# Altium PCB Gas_leakage.PcbDoc
Units mm, origin at the board's own origin, x right, y up, seen from the top; angles counter-clockwise.
Board outline 62 x 72 mm, 2 copper layers (Top Layer, Bottom Layer), stack 1.1 mm thick; 23 components, 23 nets, 81 pads, 25 vias.
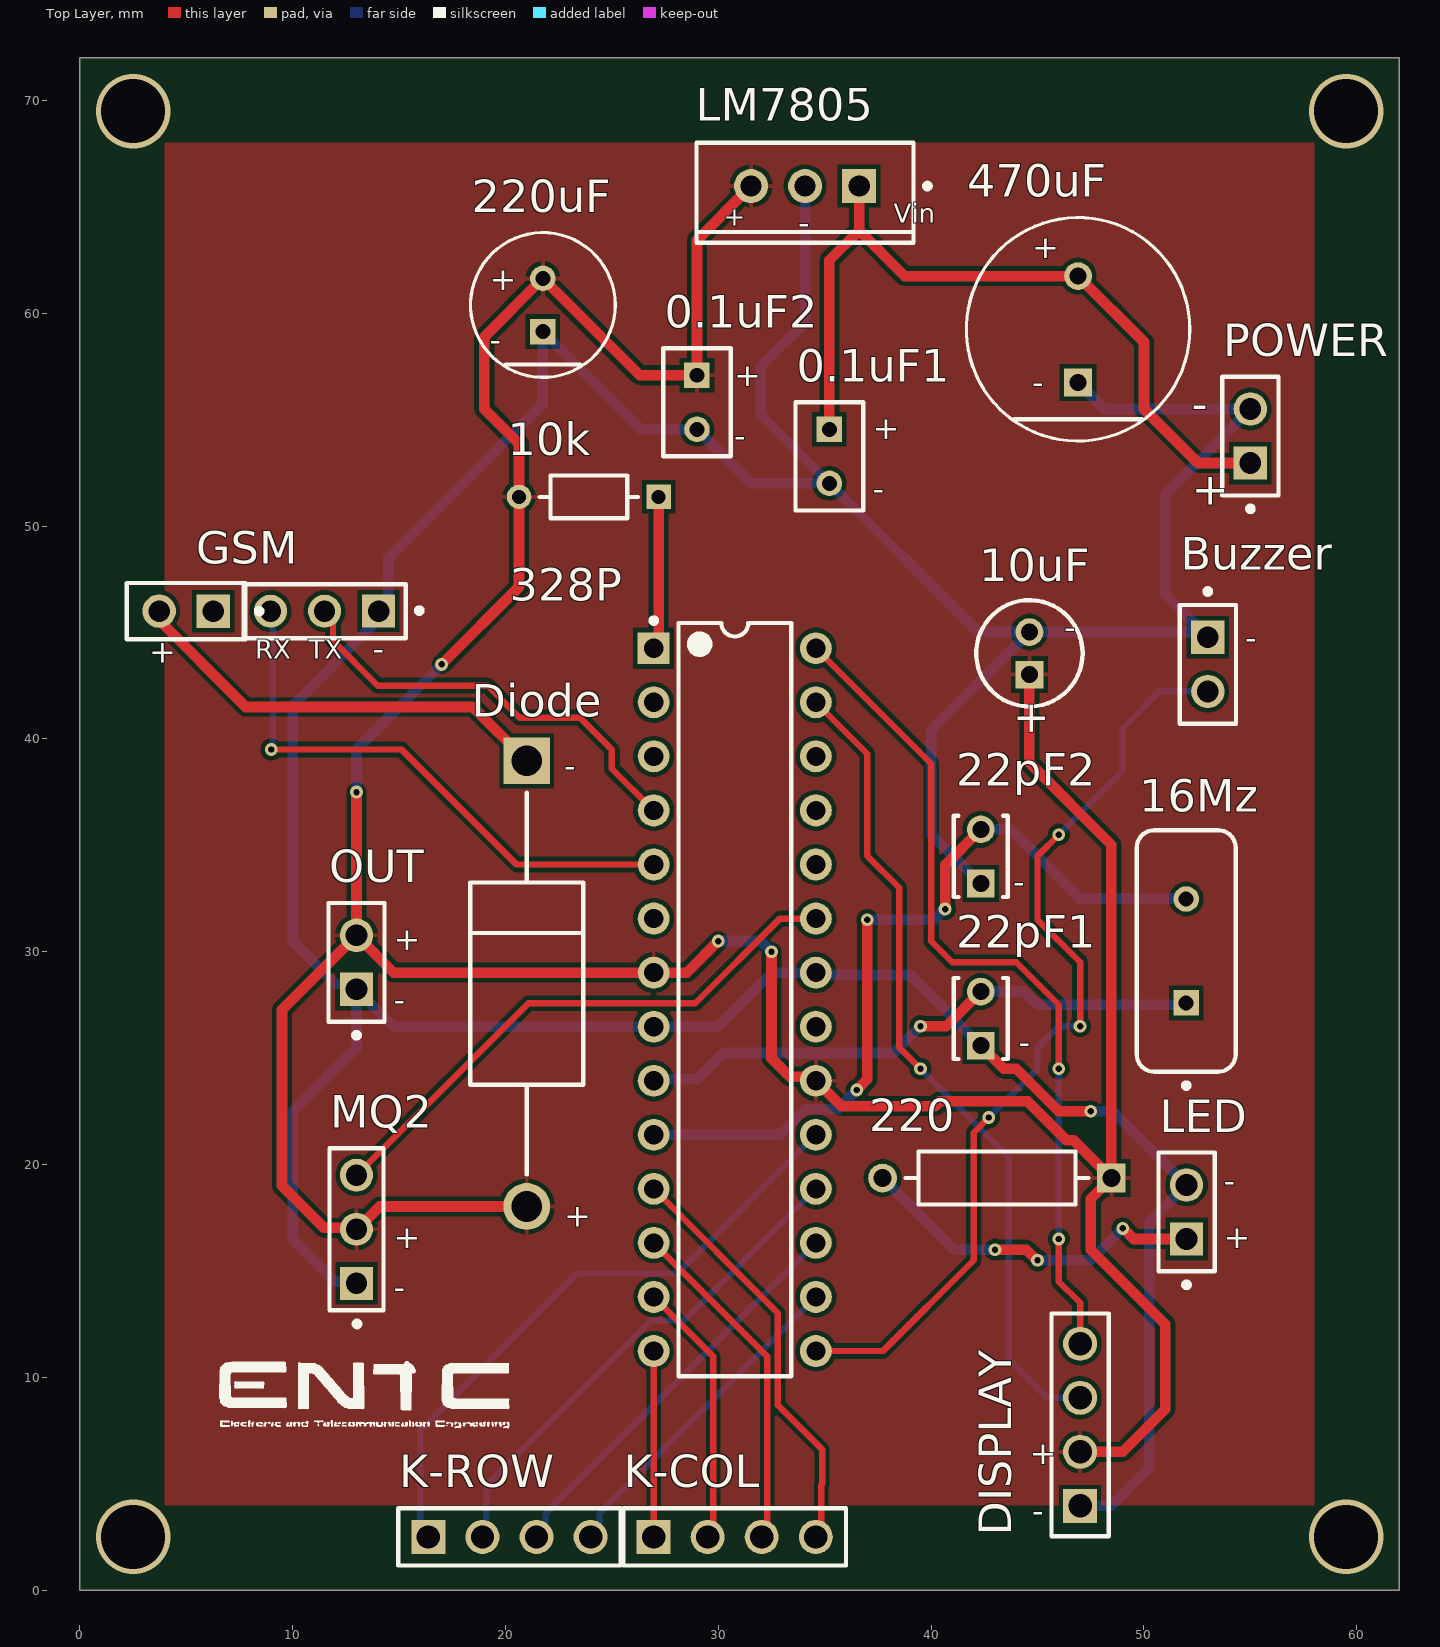
[diagram p0: Top Layer view]
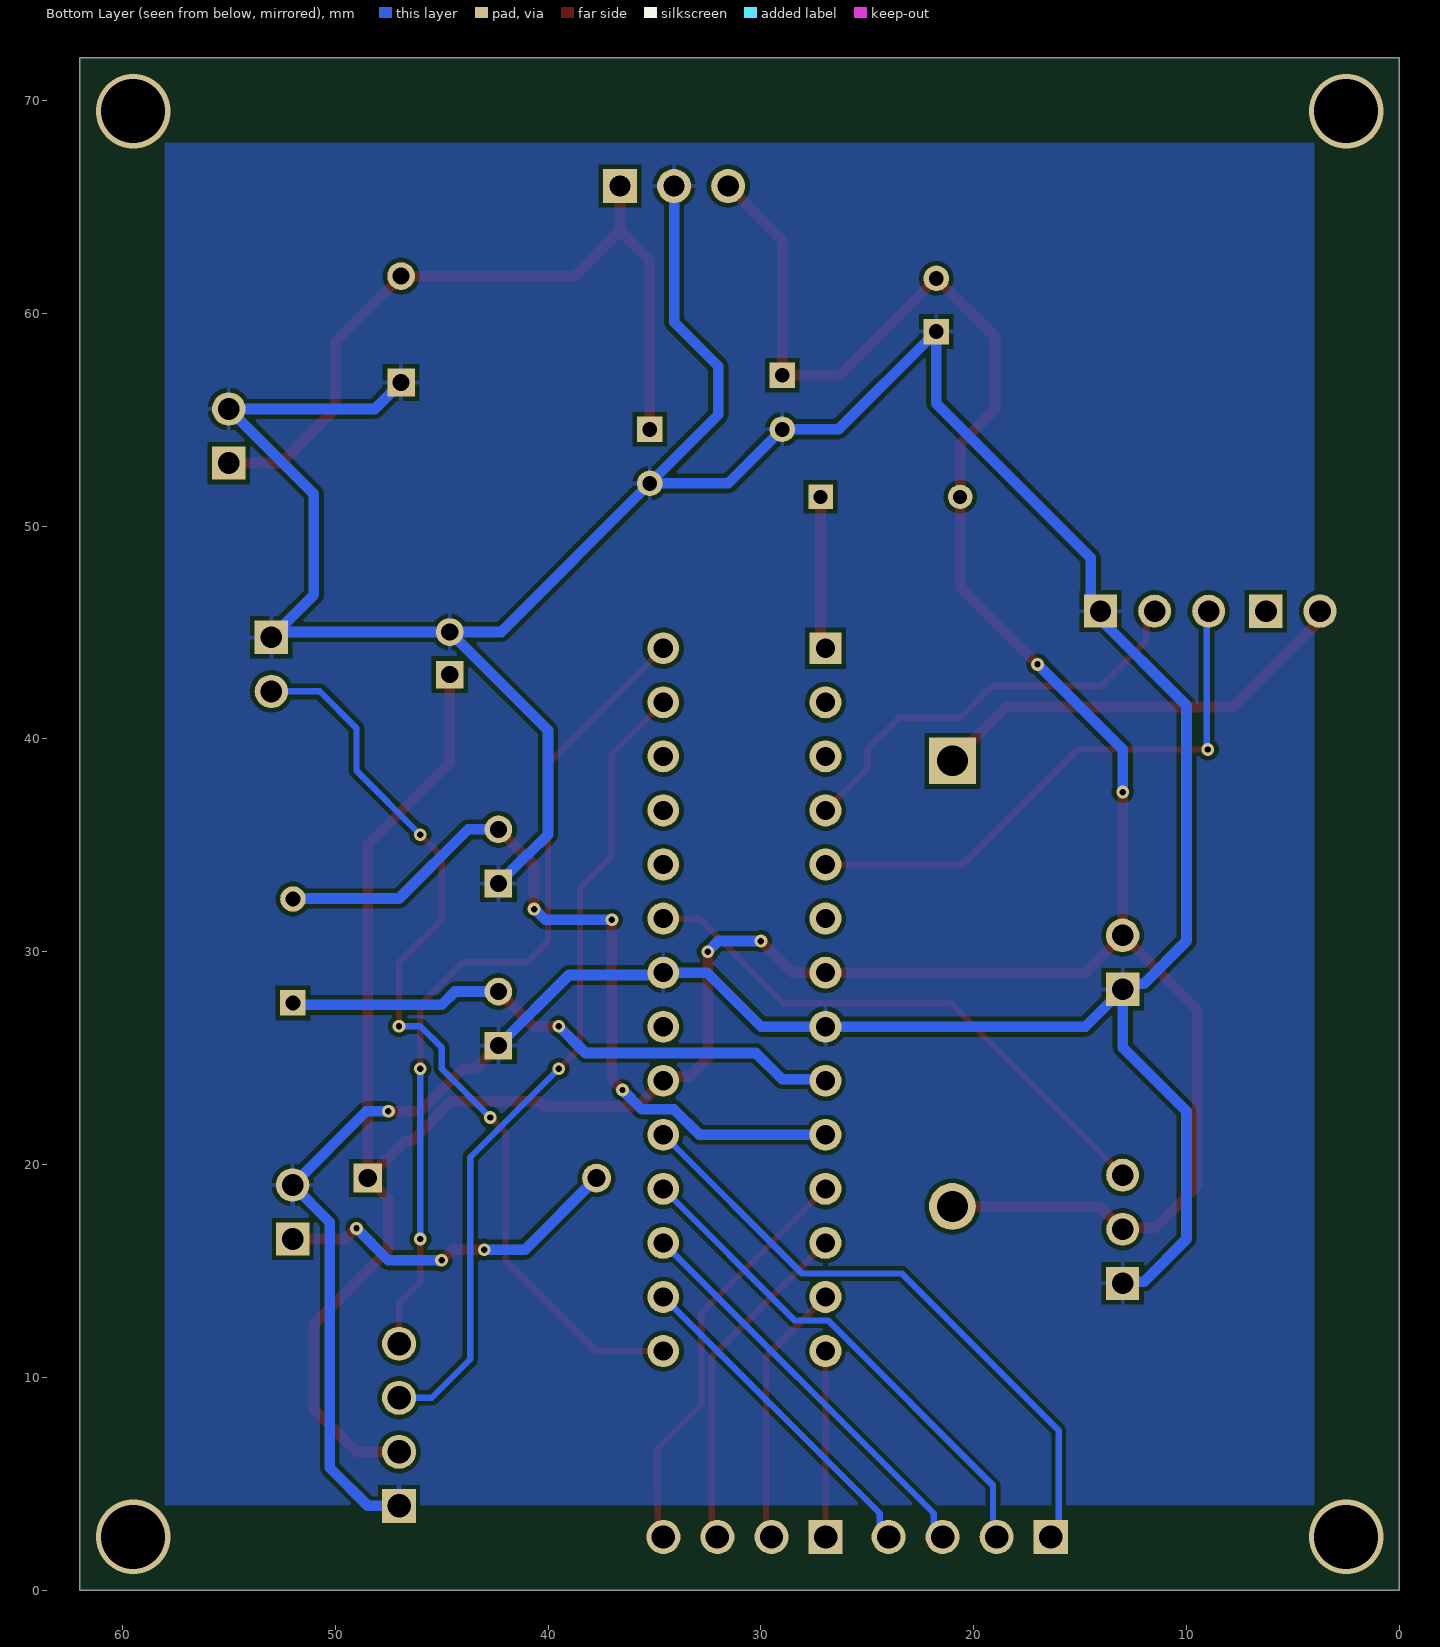
[diagram p1: Bottom Layer view, seen from below]
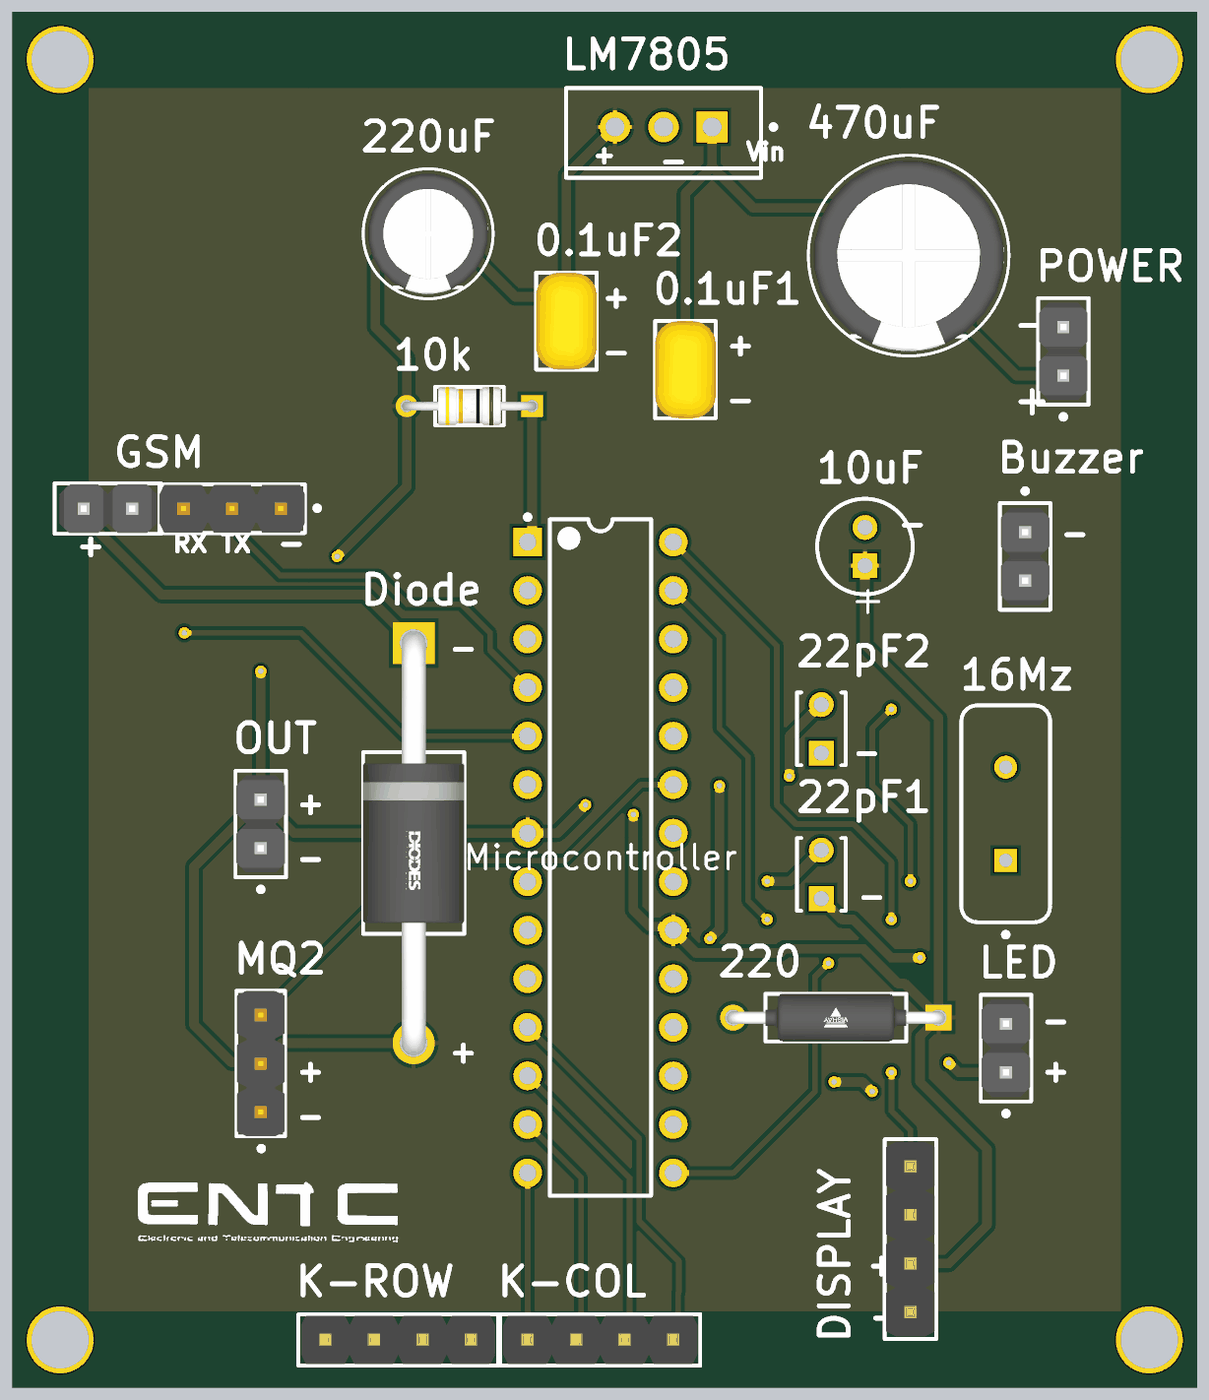
[diagram p2: 3D render of the assembled board from above, using the file's embedded part models]

## Layer stack, top to bottom
Top Solder: solder mask 0.05, SM-001, Dk 4
Top Layer: signal copper 0.1
Dielectric 1: dielectric 0.9, FR-4, Dk 4.8
Bottom Layer: signal copper 0.1
Bottom Solder: solder mask 0.05, SM-001, Dk 4

## Board outline
0,0 62,0 62,72 0,72

## Design rules (kind name [scope] priority, off if disabled: settings)
BoardOutlineClearance [All] p1: gap=0.2 ignorepadtopadclearanceinfootprint=FALSE
Clearance [All] p1: gap=0.203 ignorepadtopadclearanceinfootprint=FALSE except(0.25: Arc-Hole Track-Hole SMDPad-Hole THPad-Hole Via-Hole Fill-Hole Poly-Hole Region-Hole Text-Hole)
ComponentClearance [All] p1: gap=0.127 collisioncheckmode=3 verticalgap=0.127 showdistances=TRUE
DiffPairsRouting [All] p1: maxlimit=0.381 minlimit=0.203 mostfreqgap=0.203 toplayer_minwidth=0.203 toplayer_maxwidth=25.4 toplayer_prefwidth=0.203 bottomlayer_minwidth=0.203 bottomlayer_maxwidth=25.4 bottomlayer_prefwidth=0.203 maxuncoupledlength=12.7
Height [All] p1: minheight=0 maxheight=1816.048 prefheight=12.7
HoleSize [All] p1: absolutevalues=TRUE maxlimit=6.3 minlimit=0.3 maxpercent=80.000 minpercent=20.000
HoleToHoleClearance [All] p1: gap=0.25 allowstackedmicrovias=FALSE
MinimumAnnularRing [All] p1: minimumring=0.076
MinimumSolderMaskSliver [All] p1: minsoldermaskwidth=0
PlaneClearance [All] p1: clearance=0.203
PlaneConnect PlaneConnectPowerPads [InPadClass('PowerPads')] p1: planeconnectstyle=Direct reliefexpansion=0.508 reliefentries=4 reliefconductorwidth=0.254 reliefairgap=0.254
PlaneConnect [All] p2: pad.planeconnectstyle=Relief pad.reliefexpansion=0.3 pad.reliefentries=4 pad.reliefconductorwidth=0.203 pad.reliefairgap=0.203 via.planeconnectstyle=Direct via.reliefexpansion=0.3 via.reliefentries=4 via.reliefconductorwidth=0.127 via.reliefairgap=0.127
PolygonConnect PolygonConnectPowerPads [All vs (InPadClass('PowerPads'))] p1: connectstyle=Direct reliefconductorwidth=0.254 reliefentries=4 polygonreliefangle="90 Angle" airgapwidth=0.254
PolygonConnect [All] p2: thpad.connectstyle=Relief thpad.reliefconductorwidth=0.203 thpad.reliefentries=4 thpad.polygonreliefangle="90 Angle" thpad.airgapwidth=0.203 smdpad.connectstyle=Relief smdpad.reliefconductorwidth=0.203 smdpad.reliefentries=4 smdpad.polygonreliefangle="90 Angle" smdpad.airgapwidth=0.203 via.connectstyle=Direct via.reliefconductorwidth=0.127 via.reliefentries=4 via.polygonreliefangle="90 Angle" via.airgapwidth=0.127
RoutingVias [All] p1: holewidth=0.3 width=0.6 viastyle="Through Hole" minholewidth=0.3 minwidth=0.6 maxholewidth=0.6 maxwidth=6.6
SilkToSilkClearance [All] p1: silktosilkclearance=0
SilkToSolderMaskClearance [IsPad] p1: minsilkscreentomaskgap=0.127 clearancetoexposedcopper=TRUE
SolderMaskExpansion [All] p1: expansion=0.075 istentingtop=FALSE
UnRoutedNet [All] p1: checkbadconnections=TRUE
Width [All] p1: maxlimit=25.4 minlimit=0.203 preferedwidth=0.203 minimp=50.000000 maximp=50.000000 favimp=50.000000
19 further rules are at their usual default settings.

## Classes and differential pairs
component class Gas_leakage: 0.1uF1 0.1uF2 10k 10uF 16Mz 22pF1 22pF2 220 220uF 470uF Buzzer Diode DISPLAY KEYPAD LED LM7805 MQ2 OUT POWER

## Components (designator, comment, footprint, x,y, rotation, side; value= is the part's Value field where it differs from the comment)
0.1uF1 "SR205C104KAR" FP-SR20-MFG 35.22,53.274 r270 top value=100nF
0.1uF2 "SR205C104KAR" FP-SR20-MFG 28.997,55.814 r270 top value=100nF
10k "CF18JT10K0" FP-CF18-MFG 23.917,51.369 r180 top value=10kΩ
10uF "ECA1HM100" CAPPR55-200-1100X500X1200 44.618,44.019 r90 top
16Mz "FOXSLF/160-20" FOX-FOXSLF160-20 51.984,30.033 r90 top
22pF1 "C315C220K1G5TA" KEMT-C315-THT-2 42.332,26.858 r90 top
22pF2 "C315C220K1G5TA" KEMT-C315-THT-2 42.332,34.478 r90 top
220 "CMF55205R00FHEB" FP-CMF55-MFG 43.094,19.365 r180 top
220uF "EEUFM1A221" FP-RAD-TH-D_6_3_0_5-L_11-MFG 21.758,60.386 r90 top
328P "ATmega328P-PU" 28P3 30.775,27.747 r0 top (schematic designator Microcontroller)
470uF "EEUHD1E471" FP-RAD-TH-D_10_0_5-L_12_5-MFG 46.904,59.243 r90 top
Buzzer "M20-9990246" FP-M20-9990246-MFG 53,43.5 r270 top
Diode "1N5408G-T" FP-DO-201AD-MFG 21,28.5 r270 top
DISPLAY "61300411121" 61300411121 47,7.77 r90 top
GSM "90120-0763" FP-90120-0763-MFG 11.5,46 r180 top (schematic designator GSM1)
GSM2 "M20-9990246" FP-M20-9990246-MFG 5,46 r180 top
K-COL "61300411121" 61300411121 30.77,2.5 r0 top (schematic designator KEYPAD2)
K-ROW "1300411121" 61300411121 20.19,2.5 r0 top (schematic designator KEYPAD1)
LED "M20-9990246" FP-M20-9990246-MFG 52,17.77 r90 top
LM7805 "LM7805CT" FAIR-TO-220-3 34.077,65.974 r270 top
MQ2 "90120-0763" FP-90120-0763-MFG 13,16.96 r90 top
OUT "M20-9990246" FP-M20-9990246-MFG 13,29.5 r90 top
POWER "M20-9990246" FP-M20-9990246-MFG 55,54.23 r90 top

## Footprints (in the part's own frame and the unit in brackets; to place one, negate y for a bottom-side part, rotate by r counter-clockwise, add the part's x,y. Pads: shape width x height; smd on the part's side, far side on the other; paste and mask are expansions set on the pad)
28P3 [mm] "28-Pin Plastic Dual In-Line Package (PDIP)"
  rect 1.5x1.5 hole 0.9: 1(-3.81,16.51)
  round 1.5 hole 0.9: 2(-3.81,13.97) 3(-3.81,11.43) 4(-3.81,8.89) 5(-3.81,6.35) 6(-3.81,3.81) 7(-3.81,1.27) 8(-3.81,-1.27) 9(-3.81,-3.81) 10(-3.81,-6.35) 11(-3.81,-8.89) 12(-3.81,-11.43) 13(-3.81,-13.97) 14(-3.81,-16.51) 15(3.81,-16.51) 16(3.81,-13.97) 17(3.81,-11.43) 18(3.81,-8.89) 19(3.81,-6.35) 20(3.81,-3.81) 21(3.81,-1.27) 22(3.81,1.27) 23(3.81,3.81) 24(3.81,6.35) 25(3.81,8.89) 26(3.81,11.43) 27(3.81,13.97) 28(3.81,16.51)
  silkscreen extent -3.93,-17.7 2.65,17.93, body extent -3.6,-17.65 3.6,17.65, height 4.58
61300411121 [mm] "Pin Header, pitch 2.54 mm, THT, Vertical, single row, 4p"
  rect 1.6x1.6 hole 1.1: 1(-3.81,0)
  round 1.6 hole 1.1: 2(-1.27,0) 3(1.27,0) 4(3.81,0)
  silkscreen extent -5.23,-1.35 5.23,1.35, body extent -5.08,-1.27 5.08,1.27, height 8.57
CAPPR55-200-1100X500X1200 [mm] "THD, 2-Leads, Dia 5mm, Body Length 11mm"
  rect 1.3x1.3 hole 0.8: 1(-1,0)
  round 1.3 hole 0.8: 2(1,0)
  silkscreen extent -2.5,-2.5 2.5,2.5, body extent -2.5,-2.5 2.5,2.5, height 12
FAIR-TO-220-3 [mm] "FM, 3-Leads, Body 10.2x4.7mm, Pitch 2.54mm"
  rect 1.6x1.6 hole 1: 1(0,2.54)
  round 1.6 hole 1: 2(0,0) 3(0,-2.54)
  silkscreen extent -2.04,-5.1 2.66,5.88, body extent -2.04,-5.1 2.66,5.1, height 18.95
FOX-FOXSLF160-20 [mm] "THD, 2-Leads, Body 11.35x4.65mm"
  rect 1.2x1.2 hole 0.7: 1(-2.44,0)
  round 1.2 hole 0.7: 2(2.44,0)
  silkscreen extent -6.45,-2.32 5.68,2.32, body extent -5.67,-2.32 5.68,2.33, height 3.6
FP-90120-0763-MFG [mm]
  rect 1.55x1.55 hole 1 paste-1000 mask+0: 1(-2.54,0)
  round 1.55 hole 1 paste-1000 mask+0: 2(0,0) 3(2.54,0)
  silkscreen extent -4.58,-1.27 3.81,1.27, body extent -3.91,-1.37 3.91,1.37, height 0.25
FP-CF18-MFG [mm]
  rect 1.15x1.15 hole 0.65 paste-1000 mask+0: 1(-3.28,0)
  round 1.15 hole 0.65 paste-1000 mask+0: 2(3.28,0)
  silkscreen extent -2.3,-1 2.3,1, body extent -3.96,-1.1 3.96,1.1, height 0.25
FP-CMF55-MFG [mm]
  rect 1.35x1.35 hole 0.85 paste-1000 mask+0: 1(-5.375,0)
  round 1.35 hole 0.85 paste-1000 mask+0: 2(5.375,0)
  silkscreen extent -4.3,-1.24 4.3,1.24, body extent -6.15,-1.35 6.15,1.35, height 0.25
FP-DO-201AD-MFG [mm]
  rect 2.2x2.2 hole 1.45 paste-1000 mask+0: 1(-10.47,0)
  round 2.2 hole 1.45 paste-1000 mask+0: 2(10.47,0)
  silkscreen extent -8.97,-2.65 8.97,2.65, body extent -11.67,-2.75 11.67,2.75, height 0.25
FP-M20-9990246-MFG [mm]
  rect 1.57x1.57 hole 1.02 paste-1000 mask+0: 1(-1.27,0)
  round 1.57 hole 1.02 paste-1000 mask+0: 2(1.27,0)
  silkscreen extent -3.55,-1.32 2.79,1.32, body extent -2.89,-1.42 2.89,1.42, height 0.25
FP-RAD-TH-D_6_3_0_5-L_11-MFG [mm]
  rect 1.2x1.2 hole 0.7 paste-1000 mask+0: 1(-1.25,0)
  round 1.2 hole 0.7 paste-1000 mask+0: 2(1.25,0)
  silkscreen extent -3.4,-3.4 3.4,3.4, body extent -3.5,-3.5 3.5,3.5, height 0.25
FP-RAD-TH-D_10_0_5-L_12_5-MFG [mm]
  rect 1.3x1.3 hole 0.8 paste-1000 mask+0: 1(-2.5,0)
  round 1.3 hole 0.8 paste-1000 mask+0: 2(2.5,0)
  silkscreen extent -5.25,-5.25 5.25,5.25, body extent -5.35,-5.35 5.35,5.35, height 0.25
FP-SR20-MFG [mm]
  rect 1.2x1.2 hole 0.7 paste-1000 mask+0: 1(-1.27,0)
  round 1.2 hole 0.7 paste-1000 mask+0: 2(1.27,0)
  silkscreen extent -2.54,-1.59 2.54,1.59, body extent -2.64,-1.69 2.64,1.69, height 0.25
KEMT-C315-THT-2 [mm] "THD, 2-Leads, Body 3.81x2.54mm"
  rect 1.3x1.3 hole 0.8: 1(-1.27,0)
  round 1.3 hole 0.8: 2(1.27,0)
  silkscreen extent -1.91,-1.27 1.91,1.27, body extent -1.91,-1.27 1.91,1.27, height 4.66

## Part data
0.1uF1 0.1uF2: library part CMP-04427-000013-1, "CAP CER 0.1UF 50V X7R RADIAL", Capacitance=100nF, Manufacturer=AVX, Package=SR20, Temperature="-55°C to +125°C", Temperature Characteristic=X7R, Temperature Range High=+125°C, Temperature Range Low=-55°C, Tolerance=10%, Voltage=50V, Automotive=No, Category=Cap, ComponentLink2Description=Datasheet, ComponentLink2URL=http://datasheets.avx.com/SR-Series.pdf, Device Class L1="Passive Components", Device Class L2=Capacitors, Device Class L3="Ceramic Capacitors", Digikey Description="CAP CER 0.1UF 50V X7R RADIAL", Height=5.08mm, Lead Free=Yes, Manufacturer Part Number=SR205C104KAR, Material=Ceramic, Mouser Description="Multilayer Ceramic Capacitors MLCC - Leaded 50volts 0.1uF 10% X7R", Octopart=https://octopart.com/sr205c104kar-avx-145048, RoHS=TRUE, Voltage Rating=50V
10k: library part CMP-26528-000002-1, "RES 10K OHM 1/8W 5% CF AXIAL", Manufacturer="Stackpole Electronics", Package=CF18, Power Rating=0.125W, Resistance=10kΩ, Temperature="-55°C to +155°C", Temperature Coefficient=0-500ppm/°C, Temperature Range High=+155°C, Temperature Range Low=-55°C, Tolerance=5%, Voltage Rating=250V, Automotive=No, Category=Res, ComponentLink2Description=Datasheet, ComponentLink2URL=http://www.seielect.com/Catalog/SEI-CF_CFM.pdf, Composition="Carbon Film", Device Class L1="Passive Components", Device Class L2=Resistors, Device Class L3="Through-Hole Resistors", Digikey Description="RES 10K OHM 1/8W 5% CF AXIAL", Height=2mm, Ipc Land Pattern Name=RESAD656W65L360D200, Lead Free=Yes, Manufacturer Part Number=CF18JT10K0, Octopart=https://octopart.com/cf18jt10k0-stackpole+electronics-19205642, RoHS=TRUE, Series=CF
10uF: library part CMP-1665-00038-2, "Aluminum Electrolytic Capacitor, 10 uF, +/- 20%, 50 V, -40 to 85 degC, 2-Pin THD, RoHS, Bulk", Capacitance=10uF, Case/Package=Radial, Dielectric Material=Aluminium, Leakage Current=3uA, Manufacturer=Panasonic, Max Operating Temperature=85degC, Min Operating Temperature=-40degC, Package Description="2-Pin Radial Lead, Dia 5 mm, Height 12 mm", Package Quantity=200, Package Reference=CAPPR55-200-1100X500X1200, Ripple Current=65mA, Tolerance=20%, Voltage=50V, Datasheet URL=https://industrial.panasonic.com/cdbs/www-data/pdf/RDF0000/ABA0000C1218.pdf, Datasheet Version="Rev. 05, 10/2016", Diameter=5mm, Dissipation Factor=0.12%, Height=11mm, Height - Seated (Max)=0.472inch, Lead Diameter=0.5mm, Lead Free=LeadFree, Lead Pitch=2mm, Lead/Base Style=Straight, Length=11mm, Life (Hours)=2000Hour, Manufacturer URL=http://www.panasonic.com/, Mount=ThroughHole, Number of Pins=2, Packaging=Bulk, Radiation Hardening=No, REACH SVHC=NoSVHC, Ripple Current (AC)=65mA, RoHSCompliant=true, Termination=Radial, Voltage Rating=50V, Voltage Rating (DC)=50V
16Mz: library part CMP-1749-00003-1, "Resistance Weld Thru-Hole Crystal, 16 MHz, -20 to 70 degC, 2-Pin THD, RoHS, Bulk", Case\Package=Axial, Max Operating Temperature="155 degC", Min Operating Temperature="-55 degC", Package Quantity=200, Power Rating="250 mW", Resistance="221 kohm", Tolerance=1%, Voltage Rating="250 V", ComponentLink1Description="Manufacturer URL", ComponentLink1URL=http://www.foxonline.com/, ComponentLink2Description=Datasheet, ComponentLink2URL=http://www.foxonline.com/pdfs/hc49slf.pdf, DatasheetVersion=Mar-15, Length="0.248 inch", Mount="Through Hole", PackageDescription="2-Pin Through Hole Device, Body 11.35 x 4.65 mm", PackageReference=FOXSLF160-20, Packaging=Bulk, RoHSCompliant=true
22pF1 22pF2: library part CMP-1664-00008-1, "Capacitor, Ceramic, 22 pF, +/-10 %, 100 V, -55 to 125 degC, 2-Pin THD, RoHS, Bulk", Case\Package=TO-220, Max Input Voltage="40 V", Max Operating Temperature="125 degC", Max Ouput Current="1.5 A", Min Input Voltage="4.2 V", Min Operating Temperature="0 degC", Output Voltage="1.2 V", Package Quantity=50, ComponentLink1Description="Manufacturer URL", ComponentLink1URL=http://www.kemet.com/, ComponentLink2Description=Datasheet, ComponentLink2URL=http://capacitoredge.kemet.com/capedge2/DataSheet/Datasheet-C315C220K1G5TA.pdf?pn=C315C220K1G5TA{BULK}, DatasheetVersion=Aug-16, Height="9.28 mm", Length="10.28 mm", Mount="Through Hole", Output Current="1.5 A", Outputs=1, PackageDescription="2-Pin Through Hole Device, Body 3.81 x 2.54 mm", PackageReference=C315-THT-2, Packaging=Rail/Tube, Pins=3, Radiation Hardening=No, REACH SVHC="No SVHC", RoHSCompliant=true, Weight="0.08113 oz", Width="4.82 mm"
220: library part CMP-02408-000020-1, "RES 220 OHM 1/2W 1% AXIAL", Case/Package=Axial, Max Operating Temperature=175°C, Max Power Dissipation=500mW, Min Operating Temperature=-55°C, Package Quantity=1, Resistance=220, Resistor Type="Metal Film", Temperature Coefficient=50ppm/°C, Tolerance=1%, Voltage Rating (DC)=250V, Contact Plating=Tin, Diameter=2.29mm, Features="Moisture Resistant", Lead Free="Lead Free", Length=6.1mm, Mount="Through Hole", Number of Terminations=2, Packaging="Tape and Reel", Radiation Hardening=No, RoHS Compliant=Yes, Series=CMF, Width=2.29mm
220uF: library part CMP-05427-001329-1, "Aluminum Electrolytic Capacitors (Radial Lead Type) 220uF ±20% 10V", Capacitance=220uF, Case/Package=Radial, Dielectric Material=Aluminium, ESR (Equivalent Series Resistance)=130mR, Leakage Current=10nA, Max Operating Temperature=105°C, Min Operating Temperature=-40°C, Package Quantity=200, Ripple Current=455mA, Tolerance=20%, Voltage=10V, Construction=RADIAL, Contact Plating=Tin, Diameter=6mm, Dissipation Factor=0.19%, Height=11.2mm, Height - Seated (Max)=0.5inch, Impedance=130mR, Lead Diameter=0.5mm, Lead Free="Lead Free", Lead Length=17mm, Lead Pitch=2.5mm, Length=11mm, Life (Hours)=2000Hour, Mount="Through Hole", Number of Pins=2, Outside Diameter=6mm, Packaging=Bulk, Radiation Hardening=No, Ripple Current (AC)=455mA, RoHS Compliant=Yes, Series=FM, Termination=Radial, Voltage Rating=10V, Voltage Rating (DC)=10V
328P: library part CMP-0095-00013-2, "8-bit AVR Microcontroller, 32KB Flash, 1KB EEPROM, 2KB SRAM, 28-pin PDIP, Industrial Grade (-40°C to 85°C)", ComponentLink1Description="Manufacturer URL", ComponentLink1URL=http://www.atmel.com/, ComponentLink2Description="ATmega48A/48PA/88A/88PA/168A/168PA/328/328P Datasheet", ComponentLink2URL=http://www.atmel.com/dyn/resources/prod_documents/8271.pdf, ComponentLink3Description="ATmega48A/48PA/88A/88PA/168A/168PA/328/328P Summary", ComponentLink3URL=http://www.atmel.com/dyn/resources/prod_documents/8271S.pdf, DatasheetVersion="revD, May-2011", PackageDescription="28-lead (0.300\"/7.62mm Wide) Plastic Dual Inline Package (PDIP)", PackageReference=28P3, PackageVersion="revB, Sep-2001", RevisionNote="DatasheetVersion updated. URLs added.", Supplier 1=Digi-Key, Supplier 2=Mouser
470uF: library part CMP-05427-001388-1, "Aluminum Electrolytic Capacitors (Radial Lead Type) AEC-Q200 Qualified 470uF ±20% 25V", Capacitance=470uF, Case/Package=Radial, ESR (Equivalent Series Resistance)=600mR, Max Operating Temperature=105°C, Min Operating Temperature=-55°C, Package Quantity=200, Ripple Current=380mA, Tolerance=20%, Voltage=25V, Construction=RADIAL, Diameter=10mm, Height=12.5mm, Height - Seated (Max)=0.551inch, Lead Diameter=0.6mm, Lead Free="Lead Free", Lead Pitch=5mm, Lead/Base Style=Straight, Length=12.5mm, Life (Hours)=2000Hour, Mount="Through Hole", Number of Pins=2, Packaging=Bulk, Radiation Hardening=No, REACH SVHC="No SVHC", Ripple Current (AC)=380mA, RoHS Compliant=Yes, Series=HD, Termination=Radial, Voltage Rating=25V, Voltage Rating (DC)=25V
Buzzer GSM2 LED OUT POWER: library part CMP-15831-000009-1, "CONN HEADER VERT 2POS 2.54MM", Current Rating=3A, Manufacturer=Harwin, Temperature="-40°C to +105°C", Temperature Range High=+105°C, Temperature Range Low=-40°C, Automotive=No, Category=Conn, ComponentLink2Description=Datasheet, ComponentLink2URL=https://cdn.harwin.com/pdfs/M20-999.pdf, Conn Gender=Male, Conn Orientation=Vertical, Contact Material=Tin,Nickel, Device Class L1=Connectors, Device Class L2="Headers and Wire Housings", Device Class L3=unset, Digikey Description="CONN HEADER VERT 2POS 2.54MM", Height=8.99mm, Lead Free=Yes, Manufacturer Part Number=M20-9990246, Mouser Description="2.54mm (0.1\") Pitch SIL Vertical PC Tail Pin Header, 6.1mm mating pin height, tin, 2 contacts", Number Of Contacts=2, Number Of Rows=1, Octopart=https://octopart.com/m20-9990246-harwin-2590635, Package=M20-9990246, Pitch=2.54mm, RoHS=TRUE
Diode: library part CMP-12791-000058-1, "DIODE GEN PURP 1KV 3A DO201AD", Average Rectified Current=3A, Capacitance=40pF, Case/Package=DO-201AD, Forward Voltage=1.1V, Max Operating Temperature=150°C, Max Repetitive Reverse Voltage (Vrrm)=1kV, Max Reverse Current=5uA, Max Surge Current=125A, Min Operating Temperature=-65°C, Package Quantity=1200, Current Rating=3A, Element Configuration=Single, Forward Current=3A, Height=5.3mm, Lead Free="Lead Free", Length=9.5mm, Max Reverse Voltage (DC)=1kV, Mount="Through Hole", Number of Pins=2, Output Current=3A, Packaging="Tape and Reel", Peak Non-Repetitive Surge Current=125A, Polarity=Standard, Radiation Hardening=No, Recovery Time=2us, Reverse Recovery Time=2us, Reverse Voltage (DC)=1kV, RoHS Compliant=Yes, Series=-, Voltage Rating (DC)=1kV, Weight=0.038801oz, Width=5.3mm
DISPLAY K-COL: library part CMP-1502-01064-1, "THT Vertical Pin Header WR-PHD, Pitch 2.54 mm, Single Row, 4 pins", Contact Resistance=20mOhm, Manufacturer="Wurth Elektronik", Operating Temperature=-40to105degC, Rated Current=3A, Withstanding Voltage=500VAC, Working Voltage=250VAC, Datasheet URL=https://katalog.we-online.de/em/datasheet/6130xx11121.pdf, Gender=Male, Manufacturer URL=http://www.we-online.de, Mounting Technology=THT, Orientation=Vertical, Package Reference=61300411121, Packaging=Bag, Part Number=61300411121, Pin Number=4, Pitch=2.54mm, Publisher=WurthElektronik, Row Number=Single
GSM MQ2: library part CMP-04776-000084-1, "CONN HEADER VERT 3POS 2.54MM", Current Rating=3A, Manufacturer=Molex, Temperature="-55°C to +125°C", Temperature Range High=+125°C, Temperature Range Low=-55°C, Voltage Rating=350V, Automotive=No, Category=Conn, ComponentLink2Description=Datasheet, ComponentLink2URL=https://www.molex.com/webdocs/datasheets/pdf/en-us/0901200763_PCB_HEADERS.pdf, Conn Gender=Male, Conn Orientation=Vertical, Contact Material=Gold,Nickel, Device Class L1=Connectors, Device Class L2="Headers and Wire Housings", Device Class L3=unset, Digikey Description="CONN HEADER VERT 3POS 2.54MM", Footprint Url=https://www.molex.com/pdm_docs/sd/901200763_sd.pdf, Height=5.8mm, Lead Free=Yes, Manufacturer Part Number=90120-0763, Mouser Description="Board-To-Board Connector, C-Grid III 90120 Series, Through Hole, Header, 3, 2.54 mm", Number Of Contacts=3, Number Of Rows=1, Octopart=https://octopart.com/90120-0763-molex-655433, Package=90120-0763, Pitch=2.54mm, RoHS=TRUE
K-ROW: library part CMP-1502-01064-1, "THT Vertical Pin Header WR-PHD, Pitch 2.54 mm, Single Row, 4 pins", Contact Resistance=20mOhm, Manufacturer="Wurth Elektronik", Operating Temperature=-40to105degC, Package Reference=61300411121, Rated Current=3A, Withstanding Voltage=500VAC, Working Voltage=250VAC, Datasheet URL=https://katalog.we-online.de/em/datasheet/6130xx11121.pdf, Gender=Male, Manufacturer URL=http://www.we-online.de, Mounting Technology=THT, Orientation=Vertical, Packaging=Bag, Part Number=61300411121, Pin Number=4, Pitch=2.54mm, Publisher=WurthElektronik, Row Number=Single
LM7805: library part CMP-2000-04938-1, "Positive Voltage Regulator, 5 V, 1 A, -40 to 125 degC, 3-Pin TO-220, RoHS, Tube", Manufacturer=FairchildSemiconductor, Maximum Input Voltage=35V, Maximum Output Current=2.2(Typ)A, Maximum Quiescent Current=8mA, Operating Temperature=-40to125degC, Output Voltage=5V, Package=3TO-220AB, Package Description="3-Pin Through Hole Device, Body 10 x 4.5 mm, Pitch 2.54 mm", Package Reference=TO-220, Typical Dropout Voltage @ Current=2@1AV, Accuracy=±4%, Category=LinearRegulator, Datasheet URL=https://datasheet.ciiva.com/26904/lm7805ct-26904988.pdf, Datasheet Version=Aug-12, Line Regulation=100mV, Load Regulation=100mV, Manufacturer URL=https://www.fairchildsemi.com/, Mounting=ThroughHole, Number of Outputs=1, Output Type=Fixed, Package URL=https://www.fairchildsemi.com/package-drawings/TO/TO220B03.pdf, Packaging=Rail/Tube, Polarity=Positive, Rad Hard=No, Type=Linear

## Via types
v1: diameter 0.6, hole 0.3, Top Layer to Bottom Layer, 21 vias
v2: diameter 3.5, hole 3, Top Layer to Bottom Layer, 4 vias

## Nets (pads, with @x,y where several pads share a name; then routed paths per layer and width w, separated by ;. In a path a pad name is that pad's centre, name@x,y a point inside that pad or via, vN(x,y) a via of type N, cw(c..) or ccw(c..) an arc to the next point about the centre after c; other vN are vias at no path point)
4V: Diode.1 GSM2.2 | length 20.4
  Top Layer w0.5: GSM2.2@3.47,45.829 7.799,41.5 18.47,41.5 Diode.1
A0: 328P.23 MQ2.3 | length 26.6
  Top Layer w0.3: MQ2.3 21.08,27.58 28.92,27.58 32.897,31.557 328P.23
C1: 328P.14 K-COL.1 | length 8.6
  Top Layer w0.3: 328P.14 26.965,2.982 K-COL.1@27.219,2.728
C2: 328P.13 K-COL.2 | length 12.2
  Top Layer w0.3: 328P.13 29.759,10.983 K-COL.2@29.759,2.728
C3: 328P.12 K-COL.3 | length 15.8
  Top Layer w0.3: 328P.12 32.299,10.983 K-COL.3@32.299,2.728
C4: 328P.11 K-COL.4 | length 19.4
  Top Layer w0.3: 328P.11 32.802,13.02 32.802,8.698 34.876,6.624 34.876,4.995 34.839,4.958 K-COL.4@34.839,2.728
D9: 328P.15 Buzzer.2 | length 44
  Top Layer w0.3: 328P.15 37.737,11.237 42,15.5 42,21.5 v1(42.712,22.212) ; v1(46,35.5) 45,34.5 45,31.5 47,29.5 v1(47,26.5)
  Bottom Layer w0.3: v1(42.712,22.212) 45,24.5 45,25.5 46,26.5 v1(47,26.5) ; v1(46,35.5) 49,38.5 49,40.5 50.73,42.23 Buzzer.2
GND: 0.1uF1.2 0.1uF2.2 10uF.2 22pF1.1 22pF2.1 220uF.1 328P.8 328P.22 470uF.1 Buzzer.1 DISPLAY.1 GSM.1 LED.2 LM7805.2 MQ2.1 OUT.1 POWER.2 | length 206.7
  Top Layer w0.5: 22pF1.1 43.42,24.5 44,24.5 46,22.5 v1(47.5,22.5)
  Bottom Layer w0.5: MQ2.1 12.92,14.5 12,14.5 10,16.5 10,22.5 13,25.5 OUT.1 ; LM7805.2 34.077,59.577 32,57.5 32,55.224 0.1uF1.2 ; 22pF1.1 39.015,28.905 34.697,28.905 328P.22 32.517,29.017 29.977,26.477 328P.8 14.753,26.477 OUT.1 ; 22pF2.1 40.986,34.554 40.946,34.554 40,35.5 40,40.401 10uF.2 ; 470uF.1 48.147,55.5 POWER.2 51,51.5 51,46.77 Buzzer.1@52.751,45.019 ; DISPLAY.1 48.46,3.96 50.253,5.753 50.253,17.293 LED.2 48.54,22.5 v1(47.5,22.5) ; Buzzer.1 Buzzer.1@52.751,45.019 ; OUT.1 12.73,28.5 12,28.5 10,30.5 10,41.564 14.265,45.829 14.5,46.064 14.5,48.5 21.758,55.758 220uF.1 26.35,54.544 0.1uF2.2 31.537,52.004 0.1uF1.2 ; 0.1uF1.2 42.205,45.019 10uF.2 ; 10uF.2 Buzzer.1@52.751,45.019
"LED +": 220.2 LED.1 | length 16.7
  Top Layer w0.5: v1(43,16) 44.473,16 44.973,15.5 v1(45,15.5) ; v1(49,17) 49.027,17 49.527,16.5 v1(52,16.5)
  Bottom Layer w0.5: 220.2 41.084,16 v1(43,16) ; v1(45,15.5) 47.5,15.5 v1(49,17)
Net10k_1: 10k.1 328P.1 | length 7.2
  Top Layer w0.5: 328P.1 27.197,44.489 10k.1
R1: 328P.19 K-ROW.1 | length 29.3
  Bottom Layer w0.3: K-ROW.1@16.551,2.728 16,3.279 16,7.5 23.38,14.88 28.068,14.88 328P.19
R2: 328P.18 K-ROW.2 | length 23.5
  Bottom Layer w0.3: K-ROW.2@19.091,2.728 19.091,4.923 26.842,12.674 28.402,12.674 328P.18
R3: 328P.17 K-ROW.3 | length 19
  Bottom Layer w0.3: K-ROW.3@21.631,2.728 21.88,2.977 21.88,3.612 328P.17
R4: 328P.16 K-ROW.4 | length 15.4
  Bottom Layer w0.3: K-ROW.4@24.171,2.728 24.42,2.977 24.42,3.612 328P.16
RST: GSM2.1
RX: 328P.5 GSM.3 | length 26.6
  Top Layer w0.3: v1(9,39.5) 15.119,39.5 20.522,34.097 328P.5
  Bottom Layer w0.3: v1(9,39.5) 9.057,39.557 9.057,45.701 v1(9.185,45.829)
SCL: 328P.28 DISPLAY.4 | length 39.6
  Top Layer w0.3: 328P.28 40.003,38.839 40.003,30.497 41,29.5 44,29.5 46,27.5 v1(46,24.5) ; v1(46,16.5) 46,14.5 47,13.5 DISPLAY.4
  Bottom Layer w0.3: v1(46,16.5) v1(46,24.5)
SDA: 328P.27 DISPLAY.3 | length 38.7
  Top Layer w0.3: 328P.27 37,39.302 37,34.5 38.5,33 38.5,25.5 v1(39.5,24.5)
  Bottom Layer w0.3: v1(39.5,24.5) 43.653,20.347 43.653,10.847 45.46,9.04 DISPLAY.3
TX: 328P.4 GSM.2 | length 20.2
  Top Layer w0.3: GSM.2@11.725,45.829 11.896,45.658 11.896,44.604 14,42.5 19.162,42.5 20.662,41 23.5,41 25,39.5 25,38.602 328P.4
VCC: 0.1uF2.1 10k.2 10uF.1 220.1 220uF.2 328P.7 328P.20 Diode.2 DISPLAY.2 LM7805.3 MQ2.2 OUT.2 | length 168.2
  Top Layer w0.5: v1(13,37.5) OUT.2 ; v1(17,43.5) 20.637,47.137 10k.2 20.637,53.863 19,55.5 19,58.878 220uF.2 26.31,57.084 0.1uF2.1 28.997,63.434 LM7805.3 ; Diode.2 14.087,18.03 13.017,16.96 MQ2.2 12.935,17.025 11.475,17.025 9.5,19 9.5,27.27 OUT.2 ; v1(30,30.5) 28.517,29.017 328P.7 14.753,29.017 OUT.2 ; v1(32.5,30) 32.5,25 33.372,24.128 34.394,24.128 35.775,22.747 40.184,22.747 40.402,22.965 44.54,22.965 46.361,21.145 46.689,21.145 220.1 ; 10uF.1 44.618,38.882 48.469,35.031 220.1 ; DISPLAY.2 49,6.5 51,8.5 51,12.5 47.5,16 47.5,18.396 220.1
  Bottom Layer w0.5: v1(13,37.5) 13,39.5 v1(17,43.5) ; v1(30,30.5) 32,30.5 v1(32.5,30)
VIN: 0.1uF1.1 470uF.2 LM7805.1 POWER.1 | length 36.8
  Top Layer w0.5: 0.1uF1.1 35.22,62.486 36.617,63.883 ; LM7805.1 36.617,63.883 ; POWER.1 52.54,52.96 50,55.5 50,58.647 470uF.2 38.757,61.743 36.617,63.883
XTALA: 16Mz.1 22pF1.2 328P.9 | length 27.1
  Top Layer w0.5: v1(39.5,26.5) 40.704,26.5 22pF1.2
  Bottom Layer w0.5: 328P.9 27.028,24 29,24 30.24,25.24 38.24,25.24 v1(39.5,26.5) ; 22pF1.2 44.372,28.128 45,27.5 51.891,27.5 16Mz.1
XTALB: 16Mz.2 22pF2.2 328P.10 | length 37.9
  Top Layer w0.5: v1(36.5,23.5) 37,24 v1(37,31.5) ; v1(40.656,32) 40.656,34.072 22pF2.2
  Bottom Layer w0.5: 328P.10 32.883,21.397 34.087,22.6 35.6,22.6 v1(36.5,23.5) ; v1(37,31.5) 40.129,31.5 40.629,32 v1(40.656,32) ; 22pF2.2 43.752,35.748 47,32.5 51.957,32.5 16Mz.2
pads on no net: 328P.2 328P.3 328P.6 328P.21 328P.24 328P.25 328P.26
copper on no net:
  other v2: 2.5,2.5 59.5,2.5 2.5,69.5 59.5,69.5

## Polygon pours and split planes (outlines as drawn)
VCC on Top Layer "VCC_L01_P000" (solid, pour order 0): 4,68 58,68 58,4 4,4
GND on Bottom Layer "GND_L02_P001" (solid, pour order 1): 4,68 58,68 58,4 4,4

## Silkscreen, mask and mechanical layers (free items; w line width, h text height)
Top Overlay:
  drawing of 53 lines, arcs and shapes, not listed
  text "Vin" at 38.254,64.254 h0.9
  text "+" at 30.254,64.104 h0.9
  text "-" at 33.754,63.704 h1.1
  text "+" at 44.754,62.571 h1.1
  text "+" at 19.254,61.071 h1.1
  text "-" at 19.254,58.204 h1.1
  text "+" at 30.754,56.571 h1.1
  text "-" at 44.754,56.204 h1.1
  text "-" at 52.254,54.992 h1.52
  text "+" at 37.254,54.071 h1.1
  text "-" at 30.754,53.704 h1.1
  text "-" at 37.254,51.204 h1.1
  text "+" at 52.254,51 h1.52
  text "-" at 46.254,44.704 h1.1
  text "-" at 54.754,44.204 h1.1
  text "RX" at 8.254,43.754 h0.9
  text "TX" at 10.754,43.754 h0.9
  text "-" at 13.754,43.704 h1.1
  text "+" at 3.254,43.571 h1.1
  text "-" at 22.754,38.204 h1.1
  text "-" at 43.861,32.739 h1.1
  text "+" at 14.754,30.071 h1.1
  text "-" at 14.754,27.204 h1.1
  text "-" at 44.12,25.213 h1.1
  text "-" at 53.754,18.704 h1.1
  text "+" at 22.754,17.071 h1.1
  text "+" at 14.754,16.071 h1.1
  text "+" at 53.754,16.071 h1.1
  text "-" at 14.754,13.704 h1.1
  text "+" at 44.633,5.926 h1.1
  text "-" at 44.754,3.204 h1.1

## Text inside footprints (layer, text, board x,y; h text height)
10uF: Top Overlay "+" at 45.355,40.111 h1.5 r90